# Altium PCB 电源.PcbDoc
Units mil, origin at the board's own origin, x right, y up, seen from the top; angles counter-clockwise.
Board outline 1745 x 1035 mil, 2 copper layers (Top Layer, Bottom Layer); 14 components, 7 nets, 52 pads, 0 vias.
Unrouted connection lines stored in the file: 25.
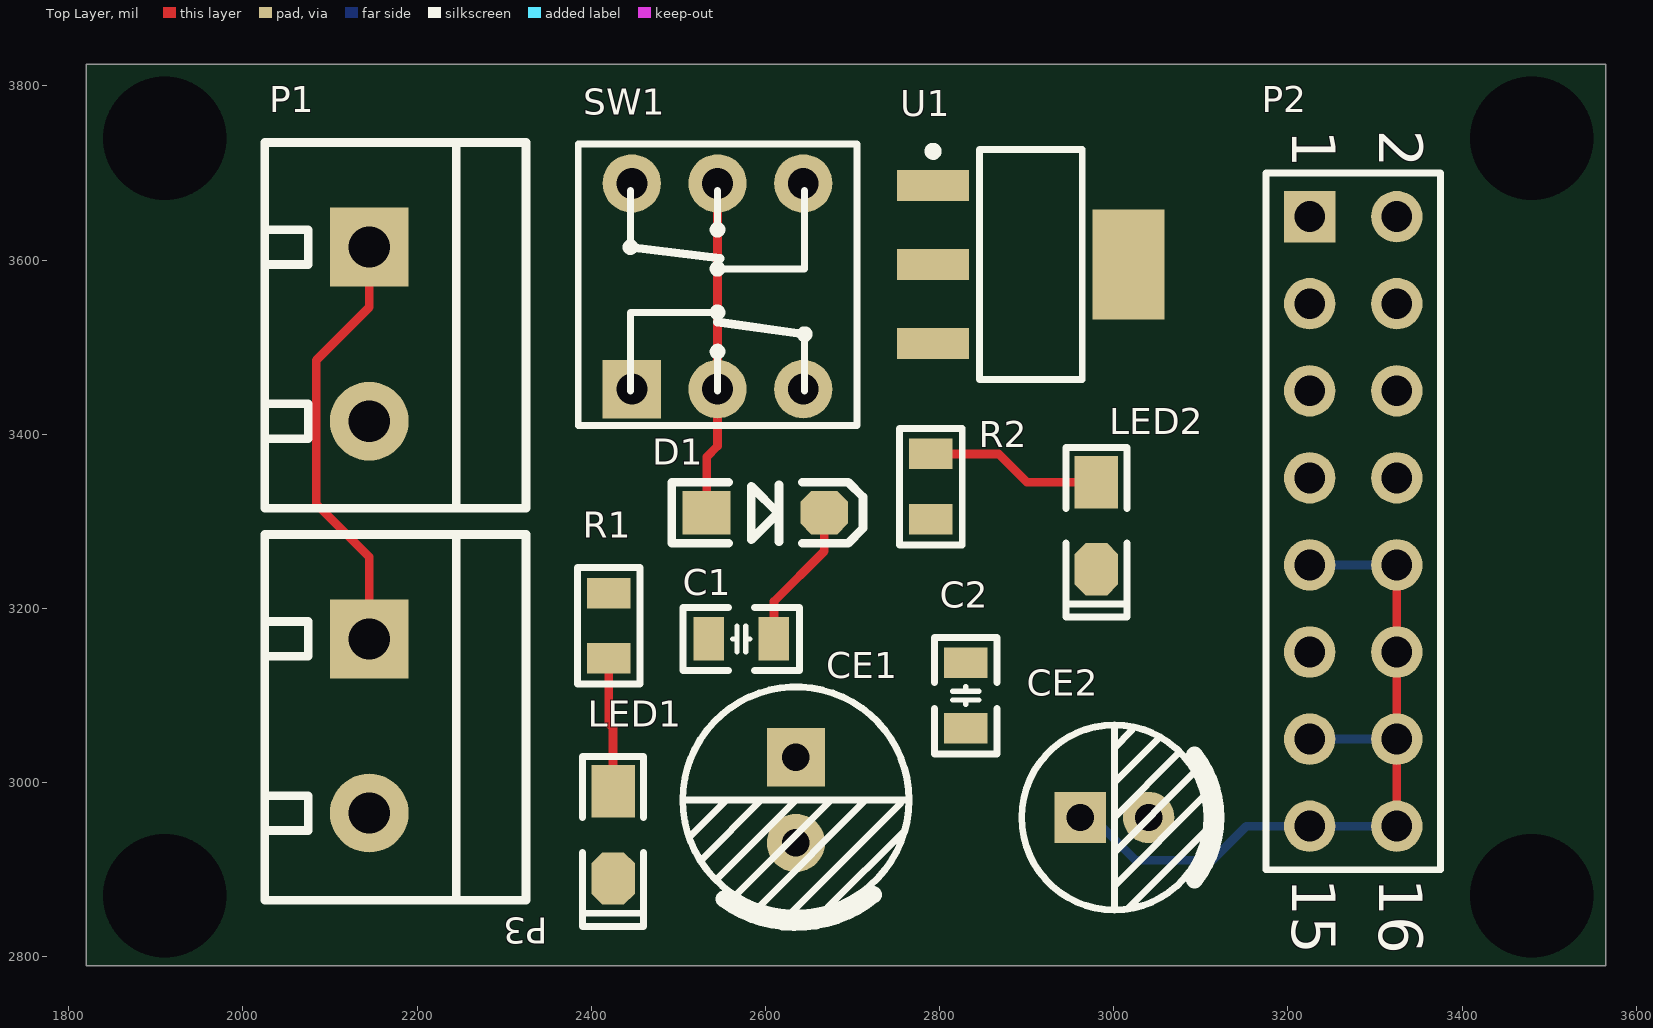
[diagram p0: Top Layer view]
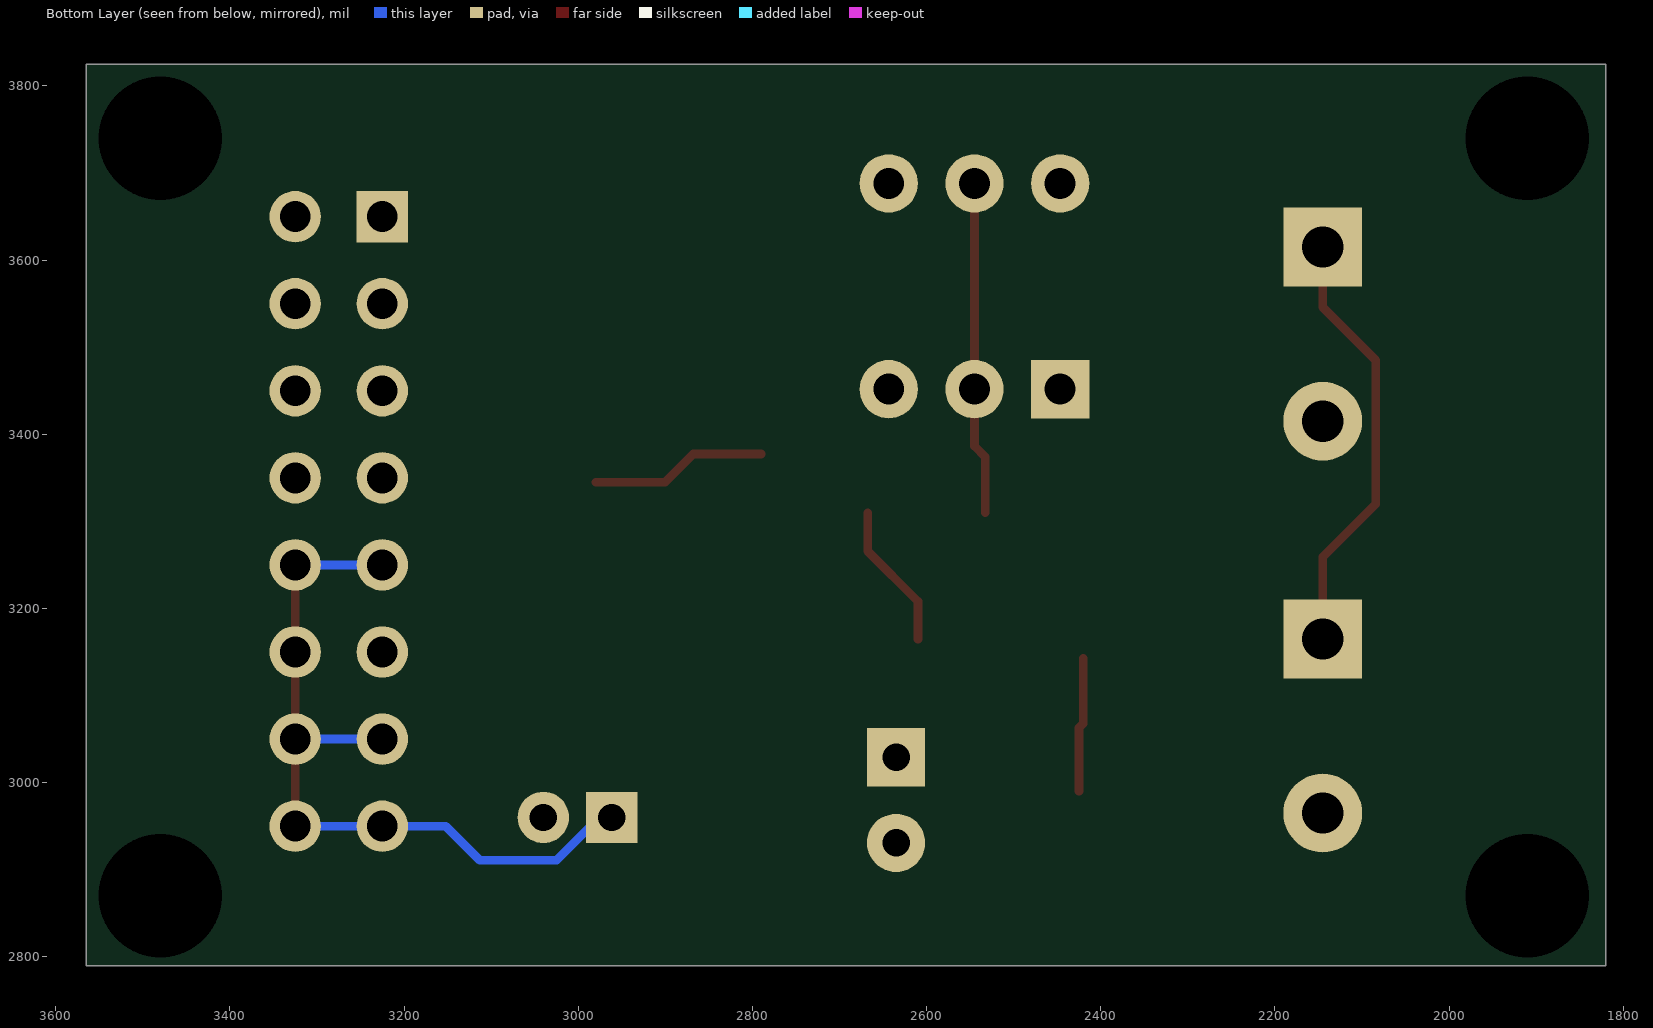
[diagram p1: Bottom Layer view, seen from below]

## Layer stack, top to bottom
Top Solder: solder mask 0.4, Solder Resist, Dk 3.5
Top Layer: signal copper 1.4
Dielectric 1: dielectric 12.6, FR-4, Dk 4.8
Bottom Layer: signal copper 1.4
Bottom Solder: solder mask 0.4, Solder Resist, Dk 3.5

## Board outline
1820,2790 1820,3825 3565,3825 3565,2790

## Design rules (kind name [scope] priority, off if disabled: settings)
Clearance [All] p1: gap=10 ignorepadtopadclearanceinfootprint=FALSE except(0: Arc-Hole Track-Hole SMDPad-Hole THPad-Hole Via-Hole Fill-Hole Poly-Hole Region-Hole Text-Hole)
PolygonConnect [All] p1: connectstyle=Relief reliefconductorwidth=10 reliefentries=4 polygonreliefangle="90 Angle" airgapwidth=10
RoutingVias [All] p1: holewidth=28 width=50 viastyle="Through Hole" minholewidth=28 minwidth=50 maxholewidth=28 maxwidth=50
SolderMaskExpansion [All] p1: expansion=4
Width [All] p1: maxlimit=10 minlimit=10 preferedwidth=10
30 further rules are at their usual default settings.

## Components (designator, comment, footprint, x,y, rotation, side; value= is the part's Value field where it differs from the comment)
C1 "0.1uF" "C 0805_L" 2572.4,3165 r0 top
C2 "0.1uF" "C 0805_L" 2830,3100 r90 top
CE1 "100uF/35V" "CAP 2.5*6.3*11.2 - BK" 2635,2980 r270 top
CE2 "47uF/35V" "CAP 2.0*5*11 - BK" 3000.63,2960 r0 top
D1 "1N4007" SOD-123 2600,3310 r0 top
LED1 "绿色" "LED 0805G" 2425,2940 r270 top
LED2 "红色" "LED 0805G" 2980,3295 r270 top
P1 "HDR-1X2" KF301-5.0-2P 2145,3415 r270 top
P2 "+5V" HDR2X8 3225,3650 r270 top
P3 "HDR-1X2" KF301-5.0-2P 2145,2965 r270 top
R1 "3.3K" "R 0805_L" 2420,3180 r90 top
R2 "2K" "R 0805_L" 2790,3340 r270 top
SW1 "KET 8X8" "KFT DIP-8X8" 2545,3570 r0 top
U1 "AMS1117-5.0" SOT223_L 2904.7,3595 r0 top

## Footprints (in the part's own frame and the unit in brackets; to place one, negate y for a bottom-side part, rotate by r counter-clockwise, add the part's x,y. Pads: shape width x height; smd on the part's side, far side on the other; paste and mask are expansions set on the pad)
"C 0805_L" [mil] "无极性贴片电容                                        淘宝ID:黄晶宝石"
  rect 35x50 smd: 1(-37.4,0) 2(37.4,0)
  silkscreen extent -67,-36 67,36, body extent -39,-24 39,24, height 20
"CAP 2.0*5*11 - BK" [mm] "脚距2mm直径5mm高度11mm"
  rect 1.5x1.5 hole 0.8: 1(-1,0)
  round 1.5 hole 0.8: 2(1,0)
  silkscreen extent -2.7,-2.7 2.96,2.7, body extent -2.5,-2.5 2.51,2.5, height 11.04
"CAP 2.5*6.3*11.2 - BK" [mm] "脚距2.5mm直径6.3mm高度11.2mm             淘宝ID:黄晶宝石"
  rect 1.7x1.7 hole 0.8: 1(-1.25,0)
  round 1.7 hole 0.8: 2(1.25,0)
  silkscreen extent -3.3,-3.3 3.56,3.3, body extent -3.15,-3.15 3.16,3.15, height 11.24
HDR2X8 [mm] "Connector; Header; 8x2 Position"
  rect 1.5x1.5 hole 0.9: 1(0,0)
  round 1.5 hole 0.9: 2(0,2.54) 3(2.54,0) 4(2.54,2.54) 5(5.08,0) 6(5.08,2.54) 7(7.62,0) 8(7.62,2.54) 9(10.16,0) 10(10.16,2.54) 11(12.7,0) 12(12.7,2.54) 13(15.24,0) 14(15.24,2.54) 15(17.78,0) 16(17.78,2.54)
  silkscreen extent -1.27,-1.27 19.05,3.81
KF301-5.0-2P [mm] "可拼接端子/6A"
  rect 2.3x2.3 hole 1.2: 1(-5.08,0)
  round 2.3 hole 1.2: 2(0,0)
  silkscreen extent -8.13,-3.05 2.54,4.57, body extent -7.95,-3 2.55,4.6, height 10.05
"KFT DIP-8X8" [mm] "自锁开关，规格：8*8mm      淘宝ID:黄晶宝石"
  rect 1.7x1.7 hole 0.9: 1(-2.5,-3)
  round 1.7 hole 0.9: 2(0,-3) 3(2.5,-3) 4(2.5,3) 5(0,3) 6(-2.5,3)
  silkscreen extent -4.06,-4.06 4.06,4.15, body extent -3.95,-3.95 4.05,4.05, height 13.1
"LED 0805G" [mil] "绿色0805LED                              淘宝ID:黄晶宝石"
  rect 60x50 smd: 1(-50,0)
  oct 60x50 smd: 2(50,0)
  silkscreen extent -90,-35 105,35, body extent -39,-25 39,25, height 32
"R 0805_L" [mil] "1/8W贴片电阻"
  rect 35x50 smd: 1(-37.4,0) 2(37.4,0)
  silkscreen extent -67,-36 67,36, body extent -39,-25 39,25, height 20
SOD-123 [mil] "2.7x1.6X1.1mm（长宽高，不包括引脚） 淘宝ID:黄晶宝石"
  rect 55x50 smd: 1(-67.5,0)
  oct 55x50 smd: 2(67.5,0)
  silkscreen extent -108,-35 112,35, body extent -73,-31 73,31, height 48
SOT223_L [mm] "SOT223, 4-Leads, Body 6.5x3.5mm, Pitch 2.3mm, Lead Span 7mm, IPC High Density"
  rect 2.1x0.9 smd: 1(-2.85,2.3) 2(-2.85,0) 3(-2.85,-2.3)
  rect 2.1x3.2 smd: 4(2.85,0)
  silkscreen extent -2.97,-3.35 1.5,3.42, body extent -1.85,-3.35 1.85,3.35, height 1.7

## Part data
C1 C2: library part C, "贴片电容"
CE1 CE2: library part CE, "直插电解电容"
D1: "整流二极管"
LED1 LED2: library part LED-SMD, "贴片LED"
P1 P3: library part "Header 2", "2P接插件"
P2: library part "Header 8X2", "Header, 8-Pin, Dual row", LatestRevisionDate=17-Jul-2002, LatestRevisionNote="Re-released for DXP Platform.", Publisher="Altium Limited"
R1 R2: library part R, "贴片电阻"
SW1: "8*8自锁开关"
U1: library part AMS1117, "三端稳压芯片", 欢迎光临淘宝店铺=https://sho, 淘宝ID=封

## Free pads (board coordinates)
  round 4 hole 141.73 unplated: 12(1910,3740) 14(3480,3740) 15(3480,2870)
  round 4 hole 141.73: 13(1910,2870)

## Nets (pads, with @x,y where several pads share a name; then routed paths per layer and width w, separated by ;. In a path a pad name is that pad's centre, name@x,y a point inside that pad or via, vN(x,y) a via of type N, cw(c..) or ccw(c..) an arc to the next point about the centre after c; other vN are vias at no path point)
+5V: C2.2 CE2.2 P2.1 P2.2 P2.3 P2.4 P2.5 P2.6 P2.7 P2.8 R2.2 U1.2
GND: C1.1 C2.1 CE1.1 CE2.1 LED1.2 LED2.2 P1.1 P2.9 P2.10 P2.11 P2.12 P2.13 P2.14 P2.15 P2.16 P3.1 U1.1 | length 1400.7
  Top Layer w10: P3.1 2145,3259 2084,3320 2084,3485 2145,3546 P1.1 ; P2.16 P2.14 P2.12 P2.10
  Bottom Layer w10: CE2.1 2976,2960 3025,2911 3113,2911 3152,2950 P2.15 P2.16 ; P2.13 P2.14 ; P2.9 P2.10
NetC1_2: C1.2 CE1.2 D1.2 U1.3 | length 168.9
  Top Layer w10: C1.2 2609.8,3208 2667.5,3265.7 D1.2
NetLED1_1: LED1.1 R1.1 | length 154.7
  Top Layer w10: R1.1 2420,3068 2425,3063 LED1.1
NetLED2_1: LED2.1 R2.1 | length 203.4
  Top Layer w10: R2.1 2868,3377.4 2900.4,3345 LED2.1
NetP1_2: P1.2 SW1.3 SW1.6
VCC: D1.1 P3.2 R1.2 SW1.2 SW1.5 | length 383.3
  Top Layer w10: D1.1 2532.5,3374 2545,3386.5 SW1.2 SW1.5
pads on no net: SW1.1 SW1.4 U1.4

## Polygon pours and split planes (outlines as drawn)
no net on Drill Drawing (solid): 1820,3825 1820,2790 3565,2790 3565,3825

## Silkscreen, mask and mechanical layers (free items; w line width, h text height)
Drill Drawing:
  lines w10: 1820,2790 1965,2790 3565,2790 3565,3825 1820,3825 1820,2790

## Text inside footprints (layer, text, board x,y; h text height)
P2: Top Overlay "16" at 3305,2890 h50 r270; Top Overlay "15" at 3205,2890 h50 r270; Top Overlay "1" at 3205,3750 h50 r270; Top Overlay "2" at 3305,3750 h50 r270